# Altium PCB PCB_LM2576.PcbDoc
Units mil, origin at the board's own origin, x right, y up, seen from the top; angles counter-clockwise.
Board outline 6000 x 4000 mil, 2 copper layers (Top Layer, Bottom Layer); 7 components, 4 nets, 18 pads, 0 vias.
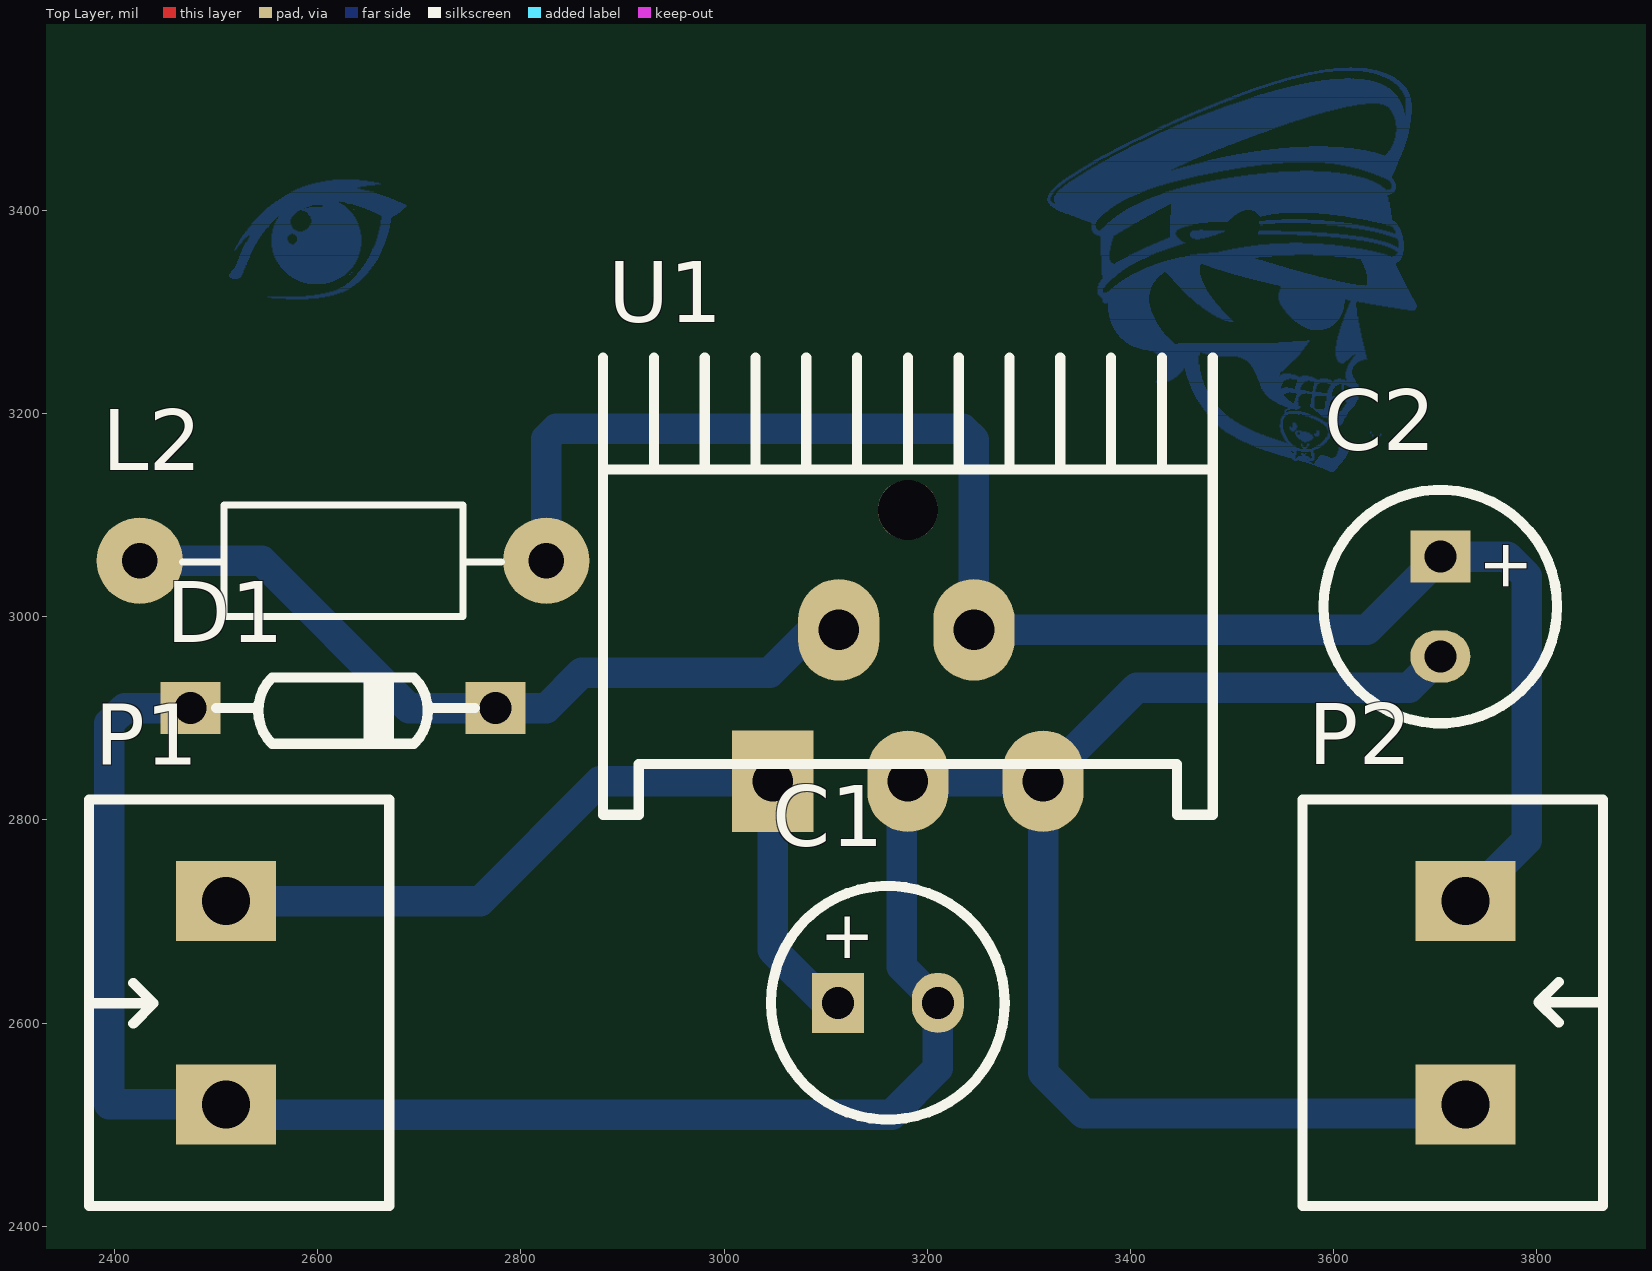
[diagram p0: Top Layer view]
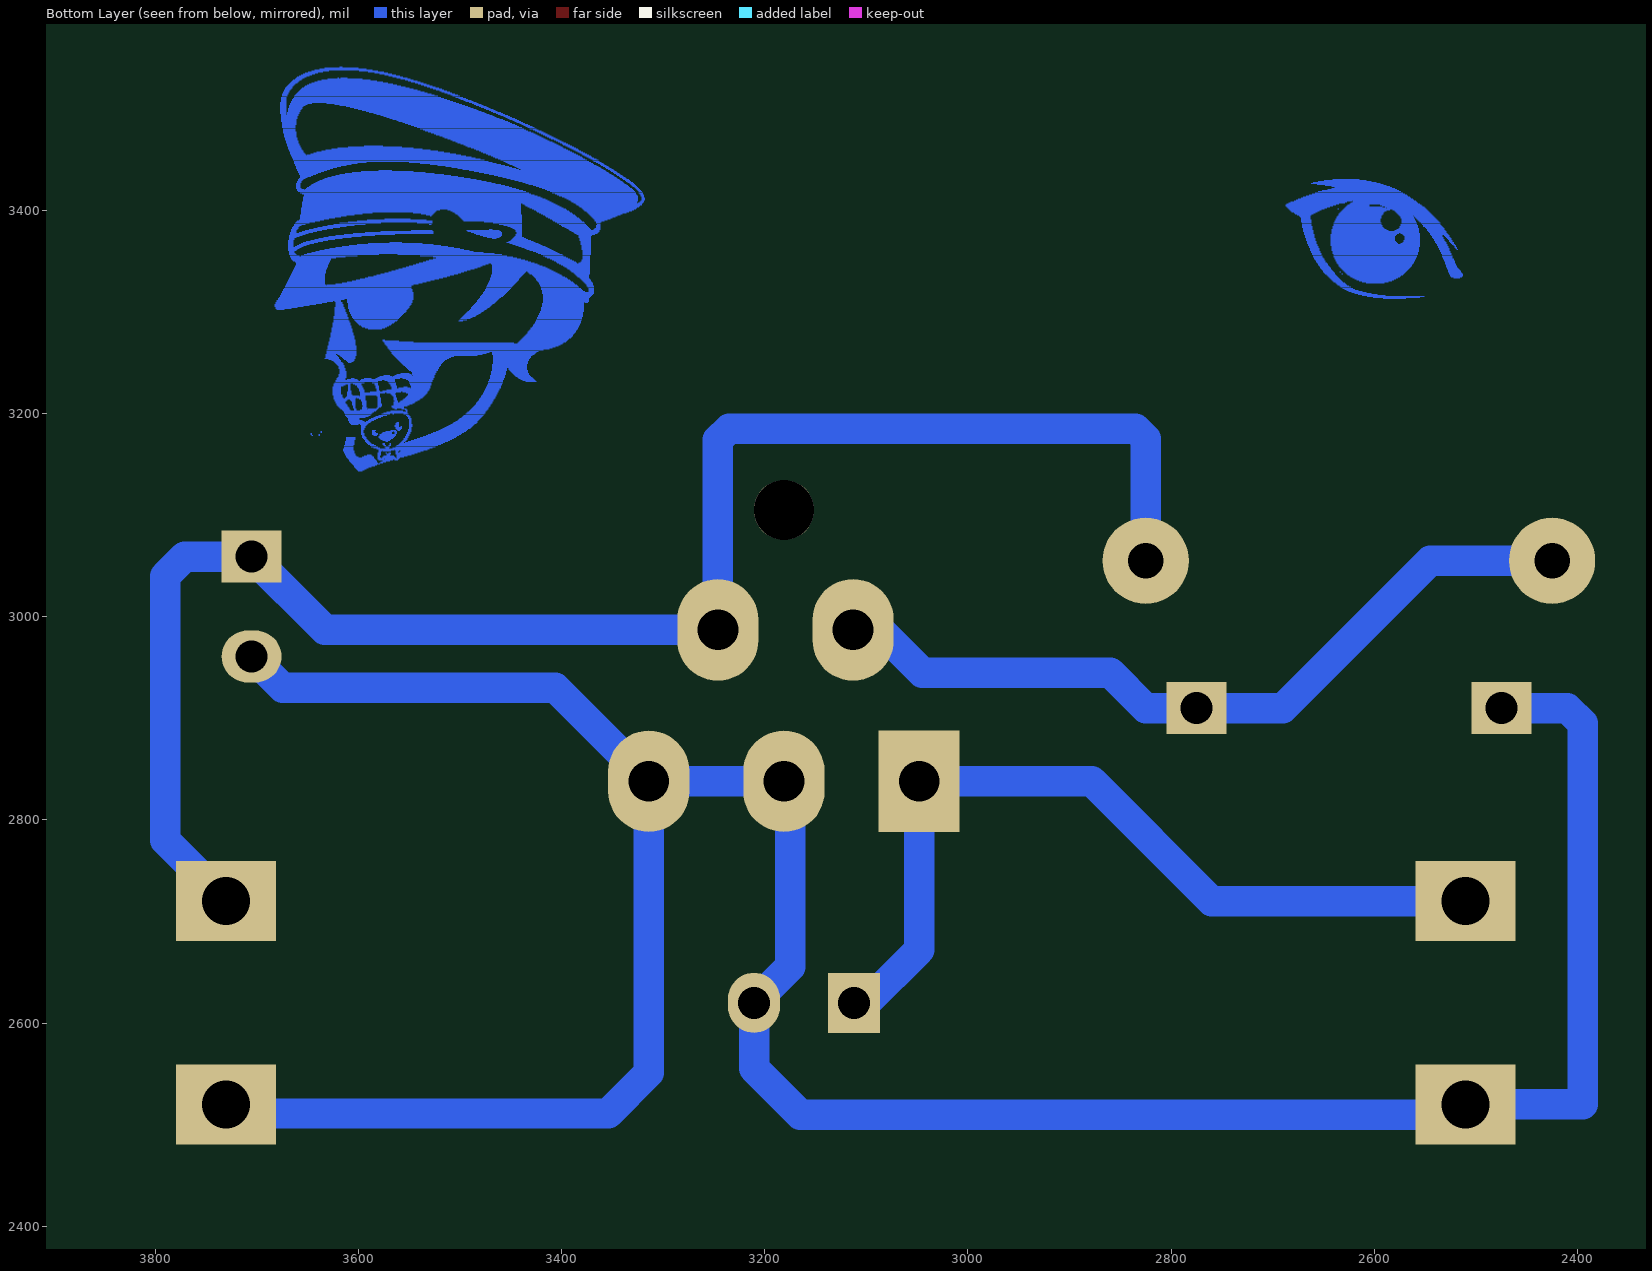
[diagram p1: Bottom Layer view, seen from below]
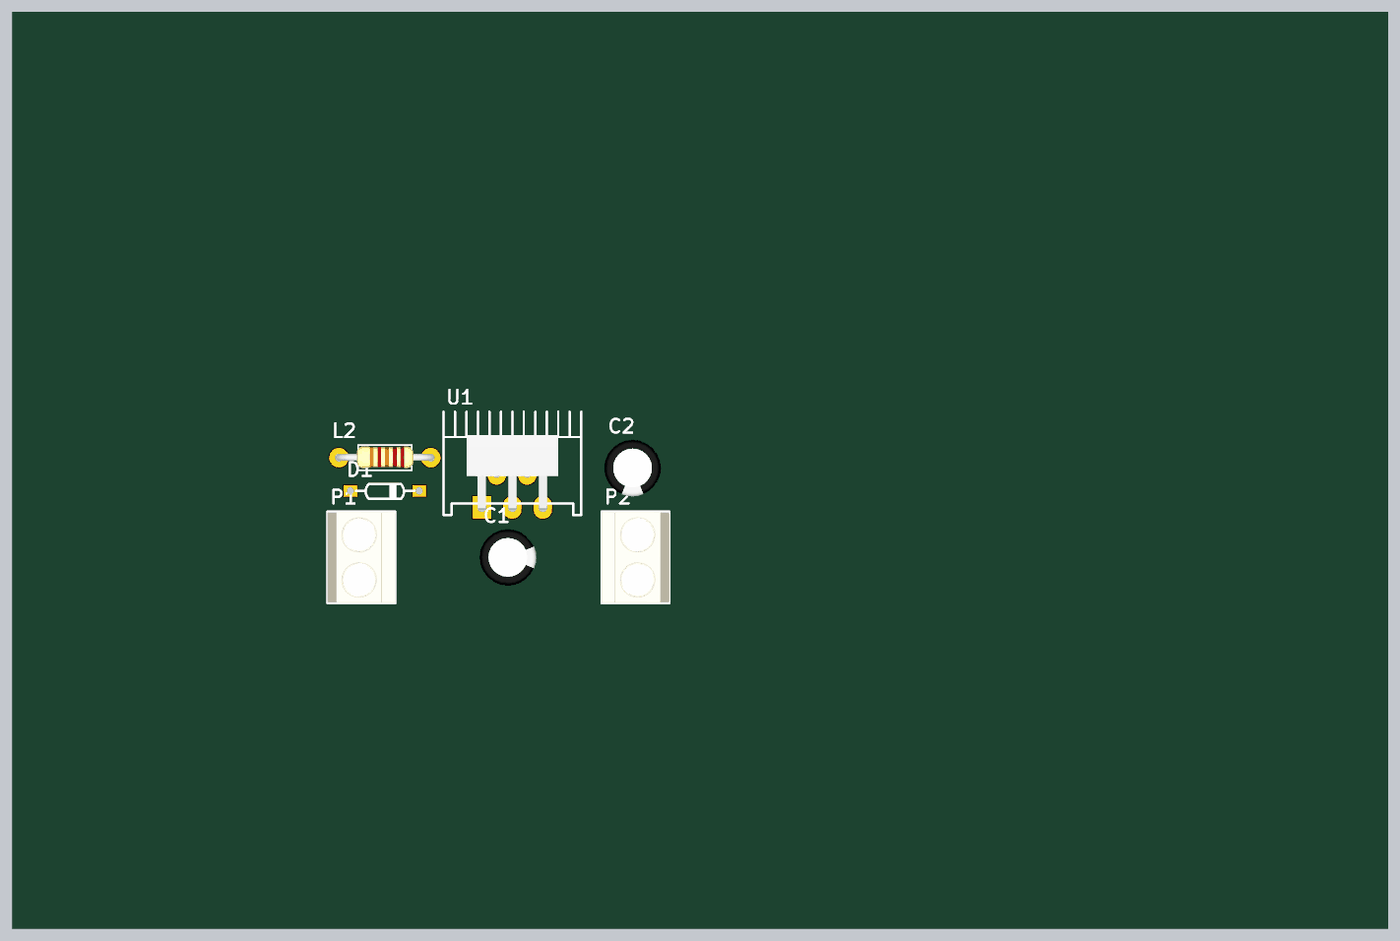
[diagram p2: 3D render of the assembled board from above, using the file's embedded part models]

## Layer stack, top to bottom
Top Solder: solder mask 0.4, Solder Resist, Dk 3.5
Top Layer: signal copper 1.4
Dielectric 1: dielectric 12.6, FR-4, Dk 4.8
Bottom Layer: signal copper 1.4
Bottom Solder: solder mask 0.4, Solder Resist, Dk 3.5

## Board outline
1000,1000 7000,1000 7000,5000 1000,5000

## Design rules (kind name [scope] priority, off if disabled: settings)
Clearance [All] p1: gap=20
PolygonConnect [All] p1: connectstyle=Relief reliefconductorwidth=10 reliefentries=4 polygonreliefangle="90 Angle" airgapwidth=10
RoutingVias [All] p1: holewidth=28 width=50 viastyle="Through Hole" minholewidth=28 minwidth=50 maxholewidth=28 maxwidth=50
SolderMaskExpansion [All] p1: expansion=4
Width [All] p1: maxlimit=100 minlimit=10 preferedwidth=20
30 further rules are at their usual default settings.

## Components (designator, comment, footprint, x,y, rotation, side; value= is the part's Value field where it differs from the comment)
C1 "Cap Pol 8mm" C8mm 3161.26,2619.99 r0 top
C2 "Cap Pol 8mm" C8mm 3705,3010 r270 top
D1 "FR307 (/FS34)" DIODE/NOM/0.5A 2475,2910 r0 top
L2 "Inductor Iron" R1/2W 2425,3055 r0 top
P1 "Header 2 - M" "Medium - Header 2" 2510,2620 r90 top
P2 "Header 2 - M" "Medium - Header 2" 3730,2620 r270 top
U1 "LM2576T-5.0" LM2576t 3180,3005 r0 top

## Footprints (in the part's own frame and the unit in brackets; to place one, negate y for a bottom-side part, rotate by r counter-clockwise, add the part's x,y. Pads: shape width x height; smd on the part's side, far side on the other; paste and mask are expansions set on the pad)
C8mm [mm]
  rect 1.3x1.5 hole 0.8: 1(-1.25,0)
  oval 1.3x1.5 hole 0.8: 2(1.25,0)
  silkscreen extent -2.92,-2.92 2.92,2.92, body extent -3.15,-3.15 3.13,3.15, height 11.51
DIODE/NOM/0.5A [mm]
  rect 1.5x1.3 hole 0.8: 1(0,0) 2(7.62,0)
  silkscreen extent 0.64,-0.89 7.11,0.76
LM2576t [mil]
  rect 80x100 hole 40: 1(-132,-167.09)
  oval 80x100 hole 40: 2(-67,-18) 3(1,-167) 4(66,-18) 5(134,-167)
  round 59.06 hole 59.06: ""(1,100)
  silkscreen extent -299,-200 301,250, body extent -199,-175 201,150, height 859
"Medium - Header 2" [mm]
  rect 2x2.5 hole 1.2: 1(-2.54,0) 2(2.54,0)
  silkscreen extent -5.08,-4.08 5.08,3.43, body extent -5,-4.07 5,3.43, height 10
R1/2W [mil] "R 1/2W, 2 pin, 300mil"
  round 85 hole 35: 1(0,0) 2(400,0)
  silkscreen extent 42,-55 356,55, body extent -12,-45 414,49, height 91

## Part data
C1 C2: "Polarized Capacitor (Axial)"
D1: library part "Diode Zener", "Zener Diode"
L2: library part "Inductor Iron_1", "Magnetic-Core Inductor"
P1 P2: "Header, 2-Pin, Medium"
U1: "SIMPLE SWITCHER; 3A Step-Down Voltage Regulator"

## Nets (pads, with @x,y where several pads share a name; then routed paths per layer and width w, separated by ;. In a path a pad name is that pad's centre, name@x,y a point inside that pad or via, vN(x,y) a via of type N, cw(c..) or ccw(c..) an arc to the next point about the centre after c; other vN are vias at no path point)
GND: C1.2 C2.2 D1.1 P1.1 P2.2 U1.3 U1.5 | length 2852.8
  Bottom Layer w30: D1.1 2410,2910 2395,2895 2395,2520 P1.1 2520,2510 3165,2510 3210.47,2555.47 C1.2 3175,2655.47 U1.3@3175,2808.53 ; U1.3 U1.5 ; C2.2 3674.21,2930 3406,2930 U1.5 ; P2.2@3721,2511 3354,2511 3314,2551 U1.5
NetD1_2: D1.2 L2.1 U1.2 | length 754
  Bottom Layer w30: L2.1 2545,3055 2690,2910 D1.2 2825,2910 2860,2945 3045,2945 U1.2@3087,2987
VIN: C1.1 P1.2 U1.1 | length 838.3
  Bottom Layer w30: P1.2 2760,2720 2877.91,2837.91 U1.1 3048,2672 3100.01,2619.99 C1.1
VOUT: C2.1 L2.2 P2.1 U1.4 | length 1663.4
  Bottom Layer w30: L2.2 2825,3175 2835,3185 3235,3185 3246,3174 U1.4 3632.79,2987 C2.1 3770.79,3059.21 3790,3040 3790,2780 P2.1
pads on no net: U1.
copper on no net: | length 62808
  Bottom Layer w1: 2513,3335 2525,3335 ; 2513,3336 2525,3336 ; 2513,3337 2526,3337 ; 2514,3334 2524,3334 ; 2514,3338 2526,3338 ; 2515,3339 2527,3339 ; 2515,3340 2527,3340 ; 2516,3333 2522,3333 ; 2516,3341 2527,3341 ; 2517,3342 2528,3342 ; 2518,3343 2528,3343 ; 2518,3361 2519,3361 ; 2519,3344 2529,3344 ; 2519,3345 2529,3345 ; 2519,3362 2520,3362 ; 2519,3363 2521,3363 ; 2520,3346 2529,3346 ; 2520,3347 2530,3347 ; 2520,3364 2521,3364 ; 2520,3365 2522,3365 ; 2521,3348 2530,3348 ; 2521,3349 2530,3349 ; 2521,3350 2531,3350 ; 2521,3366 2523,3366 ; 2522,3351 2531,3351 ; 2522,3352 2532,3352 ; 2522,3367 2524,3367 ; 2522,3368 2525,3368 ; 2523,3353 2532,3353 ; 2523,3354 2533,3354 ; 2523,3355 2533,3355 ; 2523,3369 2526,3369 ; 2523,3370 2526,3370 ; 2524,3356 2533,3356 ; 2524,3357 2534,3357 ; 2524,3371 2527,3371 ; 2524,3372 2528,3372 ; 2525,3358 2534,3358 ; 2525,3359 2535,3359 ; 2525,3373 2529,3373 ; 2526,3360 2535,3360 ; 2526,3361 2536,3361 ; 2526,3362 2536,3362 ; 2526,3374 2530,3374 ; 2526,3375 2531,3375 ; 2527,3363 2537,3363 ; 2527,3364 2537,3364 ; 2527,3376 2545,3376 ; 2528,3365 2538,3365 ; 2528,3366 2538,3366 ; 2528,3377 2545,3377 ; 2529,3367 2539,3367 ; 2529,3368 2540,3368 ; 2529,3378 2546,3378 ; 2529,3379 2547,3379 ; 2530,3369 2540,3369 ; 2530,3380 2548,3380 ; 2531,3370 2541,3370 ; 2531,3371 2541,3371 ; 2531,3381 2548,3381 ; 2531,3382 2549,3382 ; 2532,3372 2542,3372 ; 2532,3373 2543,3373 ; 2532,3383 2550,3383 ; 2533,3374 2543,3374 ; 2533,3375 2544,3375 ; 2533,3384 2552,3384 ; 2534,3385 2552,3385 ; 2535,3386 2553,3386 ; 2535,3387 2554,3387 ; 2536,3388 2555,3388 ; 2537,3389 2556,3389 ; 2538,3390 2557,3390 ; 2539,3391 2558,3391 ; 2540,3392 2559,3392 ; 2541,3393 2560,3393 ; 2542,3394 2561,3394 ; 2543,3395 2576,3395 ; 2544,3396 2577,3396 ; 2545,3397 2578,3397 ; 2546,3398 2579,3398 ; 2547,3399 2580,3399 ; 2548,3400 2582,3400 ; 2549,3401 2630,3401 ; 2550,3402 2587,3402 ; 2551,3315 2607,3315 ; 2551,3403 2589,3403 ; 2553,3404 2592,3404 ; 2554,3405 2594,3405 ; 2555,3314 2601,3314 ; 2555,3364 2642,3364 ; 2555,3365 2643,3365 ; 2555,3366 2643,3366 ; 2555,3367 2574,3367 ; 2555,3368 2572,3368 ; 2555,3369 2571,3369 ; 2555,3370 2571,3370 ; 2555,3371 2570,3371 ; 2555,3372 2570,3372 ; 2555,3373 2570,3373 ; 2555,3374 2570,3374 ; 2555,3375 2571,3375 ; 2555,3376 2572,3376 ; 2555,3377 2574,3377 ; 2555,3406 2624,3406 ; 2556,3359 2641,3359 ; 2556,3360 2642,3360 ; 2556,3361 2642,3361 ; 2556,3362 2642,3362 ; 2556,3363 2642,3363 ; 2556,3378 2642,3378 ; 2556,3379 2642,3379 ; 2556,3380 2580,3380 ; 2556,3381 2578,3381 ; 2556,3382 2576,3382 ; 2557,3356 2640,3356 ; 2557,3357 2641,3357 ; 2557,3358 2641,3358 ; 2557,3383 2575,3383 ; 2557,3384 2575,3384 ; 2557,3385 2574,3385 ; 2557,3407 2623,3407 ; 2558,3354 2640,3354 ; 2558,3355 2640,3355 ; 2558,3386 2574,3386 ; 2558,3387 2573,3387 ; 2558,3408 2621,3408 ; 2559,3352 2639,3352 ; 2559,3353 2639,3353 ; 2559,3388 2573,3388 ; 2559,3389 2573,3389 ; 2559,3409 2621,3409 ; 2560,3350 2638,3350 ; 2560,3351 2638,3351 ; 2560,3390 2573,3390 ; 2560,3391 2573,3391 ; 2561,3348 2637,3348 ; 2561,3349 2637,3349 ; 2561,3392 2574,3392 ; 2561,3393 2574,3393 ; 2561,3410 2677,3410 ; 2562,3347 2636,3347 ; 2562,3394 2575,3394 ; 2562,3411 2675,3411 ; 2563,3345 2635,3345 ; 2563,3346 2635,3346 ; 2564,3344 2634,3344 ; 2564,3412 2672,3412 ; 2565,3343 2633,3343 ; 2565,3413 2670,3413 ; 2566,3342 2632,3342 ; 2567,3341 2631,3341 ; 2567,3414 2667,3414 ; 2568,3340 2630,3340 ; 2568,3415 2664,3415 ; 2569,3313 2591,3313 ; 2569,3339 2629,3339 ; 2570,3338 2628,3338 ; 2570,3416 2661,3416 ; 2571,3337 2627,3337 ; 2572,3336 2626,3336 ; 2572,3417 2658,3417 ; 2574,3335 2624,3335 ; 2574,3418 2655,3418 ; 2575,3334 2623,3334 ; 2576,3377 2642,3377 ; 2576,3419 2651,3419 ; 2577,3333 2621,3333 ; 2577,3367 2643,3367 ; 2578,3368 2643,3368 ; 2578,3376 2643,3376 ; 2578,3420 2646,3420 ; 2579,3332 2619,3332 ; 2579,3369 2643,3369 ; 2579,3375 2643,3375 ; 2580,3370 2643,3370 ; 2580,3371 2643,3371 ; 2580,3372 2643,3372 ; 2580,3373 2643,3373 ; 2580,3374 2643,3374 ; 2580,3421 2642,3421 ; 2581,3331 2617,3331 ; 2583,3330 2615,3330 ; 2583,3422 2639,3422 ; 2585,3400 2631,3400 ; 2585,3423 2642,3423 ; 2586,3329 2612,3329 ; 2586,3380 2642,3380 ; 2588,3381 2642,3381 ; 2588,3399 2632,3399 ; 2588,3402 2629,3402 ; 2588,3424 2648,3424 ; 2589,3316 2612,3316 ; 2590,3328 2608,3328 ; 2590,3382 2641,3382 ; 2590,3398 2633,3398 ; 2591,3383 2641,3383 ; 2591,3396 2635,3396 ; 2591,3397 2634,3397 ; 2591,3425 2656,3425 ; 2592,3384 2641,3384 ; 2592,3385 2640,3385 ; 2592,3395 2635,3395 ; 2592,3403 2628,3403 ; 2593,3386 2640,3386 ; 2593,3387 2640,3387 ; 2593,3392 2637,3392 ; 2593,3393 2637,3393 ; 2593,3394 2636,3394 ; 2594,3388 2639,3388 ; 2594,3389 2639,3389 ; 2594,3390 2638,3390 ; 2594,3391 2638,3391 ; 2594,3426 2662,3426 ; 2597,3317 2616,3317 ; 2598,3427 2660,3427 ; 2603,3318 2619,3318 ; 2603,3428 2655,3428 ; 2605,3404 2627,3404 ; 2605,3405 2626,3405 ; 2608,3319 2622,3319 ; 2608,3429 2649,3429 ; 2612,3320 2625,3320 ; 2615,3430 2641,3430 ; 2616,3321 2627,3321 ; 2619,3322 2629,3322 ; 2621,3323 2631,3323 ; 2622,3409 2679,3409 ; 2623,3324 2633,3324 ; 2625,3325 2634,3325 ; 2627,3326 2636,3326 ; 2627,3408 2682,3408 ; 2628,3327 2637,3327 ; 2629,3328 2638,3328 ; 2629,3407 2684,3407 ; 2631,3329 2640,3329 ; 2631,3337 2632,3337 ; 2632,3330 2641,3330 ; 2633,3331 2642,3331 ; 2633,3339 2634,3339 ; 2634,3332 2643,3332 ; 2635,3333 2644,3333 ; 2635,3401 2636,3401 ; 2635,3406 2686,3406 ; 2636,3334 2645,3334 ; 2637,3335 2646,3335 ; 2638,3336 2647,3336 ; 2638,3405 2687,3405 ; 2639,3337 2648,3337 ; 2639,3338 2649,3338 ; 2640,3339 2650,3339 ; 2641,3340 2650,3340 ; 2641,3404 2687,3404 ; 2642,3341 2651,3341 ; 2643,3342 2652,3342 ; 2643,3343 2653,3343 ; 2644,3344 2653,3344 ; 2644,3403 2686,3403 ; 2645,3345 2654,3345 ; 2646,3346 2655,3346 ; 2646,3347 2655,3347 ; 2647,3348 2656,3348 ; 2647,3402 2685,3402 ; 2648,3349 2657,3349 ; 2648,3350 2657,3350 ; 2649,3351 2658,3351 ; 2649,3352 2659,3352 ; 2649,3401 2684,3401 ; 2650,3353 2659,3353 ; 2651,3354 2660,3354 ; 2651,3355 2660,3355 ; 2652,3356 2661,3356 ; 2652,3357 2661,3357 ; 2652,3400 2683,3400 ; 2653,3358 2662,3358 ; 2653,3359 2662,3359 ; 2654,3360 2663,3360 ; 2654,3361 2663,3361 ; 2654,3362 2663,3362 ; 2654,3399 2682,3399 ; 2655,3363 2664,3363 ; 2655,3364 2664,3364 ; 2656,3365 2665,3365 ; 2656,3366 2665,3366 ; 2656,3398 2681,3398 ; 2657,3367 2666,3367 ; 2657,3368 2666,3368 ; 2657,3369 2666,3369 ; 2658,3370 2667,3370 ; 2658,3371 2667,3371 ; 2658,3372 2667,3372 ; 2658,3397 2679,3397 ; 2659,3373 2668,3373 ; 2659,3374 2668,3374 ; 2659,3375 2668,3375 ; 2659,3376 2669,3376 ; 2660,3377 2669,3377 ; 2660,3378 2669,3378 ; 2660,3379 2670,3379 ; 2660,3380 2670,3380 ; 2660,3396 2678,3396 ; 2661,3381 2670,3381 ; 2661,3382 2670,3382 ; 2661,3383 2671,3383 ; 2661,3384 2671,3384 ; 2662,3385 2671,3385 ; 2662,3386 2671,3386 ; 2662,3387 2671,3387 ; 2662,3388 2672,3388 ; 2662,3389 2672,3389 ; 2662,3390 2672,3390 ; 2662,3395 2676,3395 ; 2663,3391 2672,3391 ; 2663,3392 2672,3392 ; 2663,3393 2673,3393 ; 2663,3394 2674,3394 ; 3318,3410 3321,3410 ; 3318,3411 3321,3411 ; 3318,3412 3321,3412 ; 3319,3408 3323,3408 ; 3319,3409 3322,3409 ; 3319,3413 3321,3413 ; 3319,3414 3322,3414 ; 3319,3415 3322,3415 ; 3320,3407 3325,3407 ; 3320,3416 3323,3416 ; 3320,3417 3324,3417 ; 3321,3405 3385,3405 ; 3321,3406 3386,3406 ; 3321,3418 3324,3418 ; 3322,3419 3325,3419 ; 3323,3404 3383,3404 ; 3323,3420 3326,3420 ; 3324,3403 3382,3403 ; 3324,3421 3327,3421 ; 3325,3409 3391,3409 ; 3325,3410 3393,3410 ; 3325,3411 3395,3411 ; 3325,3412 3397,3412 ; 3325,3413 3399,3413 ; 3325,3414 3402,3414 ; 3325,3422 3328,3422 ; 3326,3402 3380,3402 ; 3326,3407 3388,3407 ; 3326,3408 3390,3408 ; 3326,3415 3404,3415 ; 3326,3423 3330,3423 ; 3327,3401 3379,3401 ; 3327,3416 3406,3416 ; 3327,3417 3409,3417 ; 3327,3424 3331,3424 ; 3328,3418 3411,3418 ; 3328,3425 3332,3425 ; 3329,3400 3378,3400 ; 3329,3419 3414,3419 ; 3329,3426 3333,3426 ; 3330,3420 3416,3420 ; 3330,3427 3335,3427 ; 3331,3399 3377,3399 ; 3331,3421 3419,3421 ; 3332,3428 3336,3428 ; 3333,3422 3422,3422 ; 3333,3429 3337,3429 ; 3334,3398 3375,3398 ; 3334,3423 3425,3423 ; 3334,3430 3339,3430 ; 3335,3424 3428,3424 ; 3336,3397 3374,3397 ; 3336,3425 3432,3425 ; 3336,3431 3340,3431 ; 3337,3432 3342,3432 ; 3338,3426 3435,3426 ; 3339,3427 3438,3427 ; 3339,3433 3343,3433 ; 3340,3396 3373,3396 ; 3340,3428 3442,3428 ; 3340,3434 3345,3434 ; 3342,3395 3372,3395 ; 3342,3429 3446,3429 ; 3342,3435 3346,3435 ; 3343,3430 3450,3430 ; 3343,3436 3348,3436 ; 3345,3394 3371,3394 ; 3345,3431 3454,3431 ; 3345,3437 3349,3437 ; 3346,3432 3458,3432 ; 3346,3438 3351,3438 ; 3347,3393 3370,3393 ; 3348,3433 3462,3433 ; 3348,3439 3352,3439 ; 3349,3434 3466,3434 ; 3349,3440 3354,3440 ; 3350,3392 3369,3392 ; 3351,3435 3471,3435 ; 3351,3441 3356,3441 ; 3352,3391 3368,3391 ; 3353,3436 3476,3436 ; 3353,3442 3357,3442 ; 3354,3437 3481,3437 ; 3354,3443 3359,3443 ; 3355,3390 3367,3390 ; 3356,3438 3486,3438 ; 3356,3444 3361,3444 ; 3357,3439 3491,3439 ; 3358,3389 3367,3389 ; 3358,3445 3362,3445 ; 3359,3440 3440,3440 ; 3359,3446 3364,3446 ; 3361,3388 3366,3388 ; 3361,3441 3442,3441 ; 3361,3447 3366,3447 ; 3362,3381 3368,3381 ; 3362,3382 3367,3382 ; 3362,3383 3366,3383 ; 3362,3384 3366,3384 ; 3362,3385 3366,3385 ; 3362,3386 3365,3386 ; 3362,3387 3366,3387 ; 3362,3442 3444,3442 ; 3363,3379 3390,3379 ; 3363,3380 3392,3380 ; 3363,3448 3368,3448 ; 3364,3378 3388,3378 ; 3364,3443 3446,3443 ; 3364,3449 3369,3449 ; 3365,3377 3387,3377 ; 3366,3444 3448,3444 ; 3366,3450 3371,3450 ; 3367,3376 3385,3376 ; 3368,3318 3419,3318 ; 3368,3319 3419,3319 ; 3368,3320 3373,3320 ; 3368,3321 3373,3321 ; 3368,3322 3373,3322 ; 3368,3323 3373,3323 ; 3368,3324 3374,3324 ; 3368,3325 3375,3325 ; 3368,3445 3451,3445 ; 3368,3451 3373,3451 ; 3369,3317 3418,3317 ; 3369,3326 3375,3326 ; 3369,3327 3376,3327 ; 3369,3328 3377,3328 ; 3369,3446 3453,3446 ; 3370,3316 3418,3316 ; 3370,3329 3378,3329 ; 3370,3375 3383,3375 ; 3370,3452 3375,3452 ; 3371,3315 3418,3315 ; 3371,3330 3379,3330 ; 3371,3331 3380,3331 ; 3371,3356 3379,3356 ; 3371,3357 3379,3357 ; 3371,3358 3379,3358 ; 3371,3359 3379,3359 ; 3371,3360 3379,3360 ; 3371,3361 3380,3361 ; 3371,3362 3380,3362 ; 3371,3363 3380,3363 ; 3371,3364 3380,3364 ; 3371,3365 3380,3365 ; 3371,3366 3381,3366 ; 3371,3367 3381,3367 ; 3371,3368 3381,3368 ; 3371,3369 3381,3369 ; 3371,3370 3382,3370 ; 3371,3371 3382,3371 ; 3371,3372 3382,3372 ; 3371,3373 3383,3373 ; 3371,3374 3383,3374 ; 3371,3381 3393,3381 ; 3371,3447 3455,3447 ; 3371,3453 3377,3453 ; 3372,3314 3418,3314 ; 3372,3332 3381,3332 ; 3372,3337 3387,3337 ; 3372,3338 3388,3338 ; 3372,3339 3390,3339 ; 3372,3340 3391,3340 ; 3372,3341 3392,3341 ; 3372,3342 3394,3342 ; 3372,3343 3395,3343 ; 3372,3344 3397,3344 ; 3372,3345 3398,3345 ; 3372,3346 3400,3346 ; 3372,3347 3402,3347 ; 3372,3348 3383,3348 ; 3372,3349 3381,3349 ; 3372,3350 3380,3350 ; 3372,3351 3380,3351 ; 3372,3352 3379,3352 ; 3372,3353 3379,3353 ; 3372,3354 3379,3354 ; 3372,3355 3379,3355 ; 3372,3382 3395,3382 ; 3373,3310 3418,3310 ; 3373,3311 3418,3311 ; 3373,3312 3418,3312 ; 3373,3313 3418,3313 ; 3373,3333 3382,3333 ; 3373,3334 3384,3334 ; 3373,3335 3385,3335 ; 3373,3336 3386,3336 ; 3373,3383 3397,3383 ; 3373,3448 3457,3448 ; 3373,3454 3379,3454 ; 3374,3309 3377,3309 ; 3374,3384 3399,3384 ; 3375,3385 3400,3385 ; 3375,3449 3460,3449 ; 3375,3455 3380,3455 ; 3376,3386 3402,3386 ; 3377,3320 3419,3320 ; 3377,3387 3404,3387 ; 3377,3450 3462,3450 ; 3377,3456 3382,3456 ; 3378,3300 3421,3300 ; 3378,3301 3420,3301 ; 3378,3302 3420,3302 ; 3378,3303 3420,3303 ; 3378,3304 3420,3304 ; 3378,3305 3419,3305 ; 3378,3306 3419,3306 ; 3378,3307 3419,3307 ; 3378,3308 3419,3308 ; 3378,3309 3418,3309 ; 3378,3388 3406,3388 ; 3379,3295 3423,3295 ; 3379,3296 3423,3296 ; 3379,3297 3422,3297 ; 3379,3298 3422,3298 ; 3379,3299 3421,3299 ; 3379,3321 3419,3321 ; 3379,3451 3465,3451 ; 3379,3457 3384,3457 ; 3380,3292 3425,3292 ; 3380,3293 3424,3293 ; 3380,3294 3424,3294 ; 3380,3322 3420,3322 ; 3380,3389 3408,3389 ; 3380,3452 3467,3452 ; 3381,3289 3426,3289 ; 3381,3290 3426,3290 ; 3381,3291 3425,3291 ; 3381,3323 3420,3323 ; 3381,3390 3409,3390 ; 3381,3458 3386,3458 ; 3382,3287 3428,3287 ; 3382,3288 3427,3288 ; 3382,3391 3411,3391 ; 3382,3453 3469,3453 ; 3383,3285 3429,3285 ; 3383,3286 3428,3286 ; 3383,3324 3420,3324 ; 3383,3392 3413,3392 ; 3383,3459 3388,3459 ; 3384,3283 3430,3283 ; 3384,3284 3430,3284 ; 3384,3325 3421,3325 ; 3384,3454 3472,3454 ; 3384,3460 3390,3460 ; 3385,3282 3431,3282 ; 3385,3326 3421,3326 ; 3385,3348 3404,3348 ; 3385,3393 3415,3393 ; 3386,3280 3433,3280 ; 3386,3281 3432,3281 ; 3386,3349 3405,3349 ; 3386,3394 3416,3394 ; 3386,3455 3474,3455 ; 3386,3461 3392,3461 ; 3387,3279 3433,3279 ; 3387,3327 3422,3327 ; 3387,3395 3418,3395 ; 3388,3278 3434,3278 ; 3388,3328 3422,3328 ; 3388,3350 3407,3350 ; 3388,3456 3477,3456 ; 3388,3462 3394,3462 ; 3389,3276 3436,3276 ; 3389,3277 3435,3277 ; 3389,3329 3423,3329 ; 3389,3396 3420,3396 ; 3390,3275 3437,3275 ; 3390,3351 3409,3351 ; 3390,3397 3422,3397 ; 3390,3457 3479,3457 ; 3390,3463 3396,3463 ; 3391,3274 3438,3274 ; 3391,3330 3424,3330 ; 3392,3331 3425,3331 ; 3392,3352 3411,3352 ; 3392,3398 3424,3398 ; 3392,3458 3481,3458 ; 3392,3464 3398,3464 ; 3393,3273 3439,3273 ; 3393,3399 3425,3399 ; 3394,3272 3440,3272 ; 3394,3332 3425,3332 ; 3394,3353 3414,3353 ; 3394,3459 3484,3459 ; 3394,3465 3399,3465 ; 3395,3271 3441,3271 ; 3395,3333 3426,3333 ; 3395,3400 3427,3400 ; 3396,3270 3442,3270 ; 3396,3354 3416,3354 ; 3396,3401 3429,3401 ; 3396,3460 3486,3460 ; 3396,3466 3401,3466 ; 3397,3334 3427,3334 ; 3398,3269 3443,3269 ; 3398,3355 3418,3355 ; 3398,3402 3431,3402 ; 3398,3461 3489,3461 ; 3398,3467 3403,3467 ; 3399,3268 3574,3268 ; 3399,3335 3428,3335 ; 3399,3356 3420,3356 ; 3399,3462 3492,3462 ; 3400,3336 3429,3336 ; 3400,3403 3433,3403 ; 3400,3468 3405,3468 ; 3401,3267 3573,3267 ; 3401,3463 3494,3463 ; 3402,3337 3431,3337 ; 3402,3357 3423,3357 ; 3402,3404 3435,3404 ; 3402,3469 3407,3469 ; 3403,3266 3572,3266 ; 3403,3464 3496,3464 ; 3404,3338 3432,3338 ; 3404,3358 3425,3358 ; 3404,3405 3436,3405 ; 3404,3470 3410,3470 ; 3405,3465 3499,3465 ; 3406,3265 3571,3265 ; 3406,3339 3433,3339 ; 3406,3359 3428,3359 ; 3406,3406 3438,3406 ; 3406,3471 3412,3471 ; 3407,3466 3502,3466 ; 3408,3340 3468,3340 ; 3408,3360 3431,3360 ; 3408,3407 3655,3407 ; 3408,3472 3414,3472 ; 3409,3264 3571,3264 ; 3409,3467 3504,3467 ; 3410,3341 3468,3341 ; 3410,3361 3434,3361 ; 3410,3408 3655,3408 ; 3410,3473 3416,3473 ; 3412,3263 3570,3263 ; 3412,3342 3468,3342 ; 3412,3362 3436,3362 ; 3412,3409 3654,3409 ; 3412,3468 3507,3468 ; 3412,3474 3418,3474 ; 3414,3343 3468,3343 ; 3414,3363 3439,3363 ; 3414,3410 3654,3410 ; 3414,3469 3509,3469 ; 3414,3475 3420,3475 ; 3416,3344 3468,3344 ; 3416,3364 3442,3364 ; 3416,3411 3654,3411 ; 3416,3470 3512,3470 ; 3416,3476 3422,3476 ; 3418,3262 3569,3262 ; 3418,3471 3515,3471 ; 3418,3477 3424,3477 ; 3419,3345 3468,3345 ; 3419,3365 3445,3365 ; 3419,3412 3654,3412 ; 3420,3472 3517,3472 ; 3420,3478 3426,3478 ; 3421,3366 3448,3366 ; 3421,3413 3654,3413 ; 3422,3346 3468,3346 ; 3422,3473 3520,3473 ; 3423,3261 3568,3261 ; 3423,3367 3451,3367 ; 3423,3479 3428,3479 ; 3424,3347 3469,3347 ; 3424,3414 3653,3414 ; 3424,3474 3523,3474 ; 3425,3231 3435,3231 ; 3425,3260 3468,3260 ; 3425,3480 3431,3480 ; 3426,3232 3438,3232 ; 3426,3259 3468,3259 ; 3426,3368 3454,3368 ; 3426,3475 3525,3475 ; 3427,3233 3440,3233 ; 3427,3258 3468,3258 ; 3427,3348 3540,3348 ; 3427,3415 3653,3415 ; 3427,3481 3433,3481 ; 3428,3234 3442,3234 ; 3428,3369 3452,3369 ; 3428,3476 3528,3476 ; 3429,3235 3443,3235 ; 3429,3257 3467,3257 ; 3429,3482 3435,3482 ; 3430,3236 3445,3236 ; 3430,3255 3467,3255 ; 3430,3256 3467,3256 ; 3430,3349 3536,3349 ; 3430,3370 3450,3370 ; 3430,3416 3655,3416 ; 3430,3477 3531,3477 ; 3431,3237 3446,3237 ; 3431,3254 3467,3254 ; 3431,3483 3437,3483 ; 3432,3238 3447,3238 ; 3432,3239 3448,3239 ; 3432,3252 3467,3252 ; 3432,3253 3467,3253 ; 3432,3417 3657,3417 ; 3433,3240 3449,3240 ; 3433,3241 3450,3241 ; 3433,3242 3451,3242 ; 3433,3249 3467,3249 ; 3433,3250 3467,3250 ; 3433,3251 3467,3251 ; 3433,3350 3533,3350 ; 3433,3371 3449,3371 ; 3433,3478 3534,3478 ; 3433,3484 3439,3484 ; 3434,3243 3452,3243 ; 3434,3244 3452,3244 ; 3434,3245 3468,3245 ; 3434,3246 3468,3246 ; 3434,3247 3468,3247 ; 3434,3248 3468,3248 ; 3435,3339 3468,3339 ; 3435,3372 3448,3372 ; 3435,3418 3659,3418 ; 3435,3479 3536,3479 ; 3436,3338 3468,3338 ; 3436,3351 3530,3351 ; 3436,3485 3441,3485 ; 3437,3337 3468,3337 ; 3437,3373 3447,3373 ; 3437,3480 3539,3480 ; 3438,3336 3469,3336 ; 3438,3419 3660,3419 ; 3438,3486 3444,3486 ; 3439,3335 3469,3335 ; 3439,3374 3446,3374 ; 3439,3375 3445,3375 ; 3439,3376 3445,3376 ; 3439,3377 3444,3377 ; 3439,3378 3444,3378 ; 3439,3379 3445,3379 ; 3439,3380 3445,3380 ; 3439,3381 3446,3381 ; 3439,3382 3448,3382 ; 3439,3383 3450,3383 ; 3439,3384 3453,3384 ; 3439,3385 3457,3385 ; 3439,3386 3461,3386 ; 3439,3387 3467,3387 ; 3439,3388 3476,3388 ; 3439,3389 3496,3389 ; 3439,3390 3497,3390 ; 3439,3391 3498,3391 ; 3439,3392 3499,3392 ; 3439,3393 3500,3393 ; 3439,3394 3501,3394 ; 3439,3395 3502,3395 ; 3439,3481 3542,3481 ; 3440,3334 3469,3334 ; 3440,3352 3526,3352 ; 3440,3396 3504,3396 ; 3440,3397 3505,3397 ; 3440,3398 3507,3398 ; 3440,3399 3509,3399 ; 3440,3400 3512,3400 ; 3440,3401 3656,3401 ; 3440,3402 3656,3402 ; 3440,3403 3655,3403 ; 3440,3404 3655,3404 ; 3440,3405 3655,3405 ; 3440,3406 3655,3406 ; 3440,3487 3446,3487 ; 3441,3333 3470,3333 ; 3442,3331 3470,3331 ; 3442,3332 3470,3332 ; 3442,3420 3652,3420 ; 3442,3440 3497,3440 ; 3442,3482 3545,3482 ; 3442,3488 3448,3488 ; 3443,3330 3471,3330 ; 3444,3329 3471,3329 ; 3444,3353 3523,3353 ; 3444,3483 3548,3483 ; 3444,3489 3451,3489 ; 3445,3328 3472,3328 ; 3445,3421 3651,3421 ; 3445,3441 3502,3441 ; 3446,3327 3472,3327 ; 3446,3484 3551,3484 ; 3446,3490 3453,3490 ; 3447,3269 3574,3269 ; 3447,3326 3473,3326 ; 3448,3325 3473,3325 ; 3448,3354 3526,3354 ; 3449,3324 3474,3324 ; 3449,3422 3650,3422 ; 3449,3442 3508,3442 ; 3449,3485 3554,3485 ; 3449,3491 3455,3491 ; 3450,3323 3474,3323 ; 3451,3322 3475,3322 ; 3451,3486 3556,3486 ; 3451,3492 3457,3492 ; 3452,3321 3475,3321 ; 3452,3423 3648,3423 ; 3452,3443 3514,3443 ; 3453,3320 3476,3320 ; 3453,3487 3560,3487 ; 3453,3493 3460,3493 ; 3454,3242 3468,3242 ; 3454,3243 3468,3243 ; 3454,3244 3468,3244 ; 3454,3319 3477,3319 ; 3454,3355 3539,3355 ; 3455,3238 3469,3238 ; 3455,3239 3469,3239 ; 3455,3240 3469,3240 ; 3455,3241 3469,3241 ; 3455,3318 3477,3318 ; 3456,3235 3470,3235 ; 3456,3236 3470,3236 ; 3456,3237 3470,3237 ; 3456,3317 3478,3317 ; 3456,3424 3647,3424 ; 3456,3444 3522,3444 ; 3456,3488 3562,3488 ; 3456,3494 3462,3494 ; 3457,3233 3471,3233 ; 3457,3234 3470,3234 ; 3457,3316 3479,3316 ; 3458,3230 3472,3230 ; 3458,3231 3472,3231 ; 3458,3232 3471,3232 ; 3458,3315 3480,3315 ; 3458,3489 3566,3489 ; 3458,3495 3464,3495 ; 3459,3228 3473,3228 ; 3459,3229 3472,3229 ; 3459,3356 3561,3356 ; 3459,3375 3480,3375 ; 3459,3376 3484,3376 ; 3459,3377 3486,3377 ; 3459,3378 3489,3378 ; 3460,3225 3474,3225 ; 3460,3226 3474,3226 ; 3460,3227 3473,3227 ; 3460,3314 3480,3314 ; 3460,3374 3477,3374 ; 3460,3379 3492,3379 ; 3460,3425 3646,3425 ; 3460,3445 3529,3445 ; 3460,3496 3467,3496 ; 3461,3223 3475,3223 ; 3461,3224 3475,3224 ; 3461,3313 3481,3313 ; 3461,3373 3473,3373 ; 3461,3380 3493,3380 ; 3461,3490 3569,3490 ; 3462,3221 3476,3221 ; 3462,3222 3476,3222 ; 3462,3312 3482,3312 ; 3463,3219 3477,3219 ; 3463,3220 3477,3220 ; 3463,3311 3483,3311 ; 3463,3497 3469,3497 ; 3464,3217 3479,3217 ; 3464,3218 3478,3218 ; 3464,3310 3483,3310 ; 3464,3372 3468,3372 ; 3464,3446 3539,3446 ; 3464,3491 3572,3491 ; 3465,3215 3480,3215 ; 3465,3216 3479,3216 ; 3465,3309 3484,3309 ; 3465,3426 3644,3426 ; 3465,3498 3471,3498 ; 3466,3214 3481,3214 ; 3466,3308 3485,3308 ; 3466,3357 3650,3357 ; 3466,3492 3575,3492 ; 3467,3212 3482,3212 ; 3467,3213 3481,3213 ; 3467,3499 3474,3499 ; 3468,3210 3484,3210 ; 3468,3211 3483,3211 ; 3468,3307 3486,3307 ; 3468,3381 3471,3381 ; 3468,3447 3550,3447 ; 3468,3493 3578,3493 ; 3469,3209 3484,3209 ; 3469,3306 3487,3306 ; 3469,3427 3642,3427 ; 3470,3207 3486,3207 ; 3470,3208 3485,3208 ; 3470,3305 3488,3305 ; 3470,3500 3476,3500 ; 3471,3206 3487,3206 ; 3471,3260 3567,3260 ; 3471,3304 3489,3304 ; 3471,3494 3582,3494 ; 3472,3204 3489,3204 ; 3472,3205 3488,3205 ; 3472,3347 3543,3347 ; 3472,3448 3663,3448 ; 3472,3501 3479,3501 ; 3473,3203 3490,3203 ; 3473,3303 3489,3303 ; 3474,3202 3491,3202 ; 3474,3259 3567,3259 ; 3474,3302 3490,3302 ; 3474,3428 3640,3428 ; 3474,3495 3585,3495 ; 3474,3502 3481,3502 ; 3475,3200 3493,3200 ; 3475,3201 3492,3201 ; 3475,3346 3546,3346 ; 3476,3199 3494,3199 ; 3476,3301 3491,3301 ; 3476,3449 3664,3449 ; 3476,3496 3589,3496 ; 3477,3198 3496,3198 ; 3477,3300 3492,3300 ; 3477,3358 3646,3358 ; 3477,3503 3484,3503 ; 3478,3197 3497,3197 ; 3478,3258 3566,3258 ; 3478,3345 3550,3345 ; 3479,3196 3498,3196 ; 3479,3299 3493,3299 ; 3479,3429 3638,3429 ; 3479,3497 3592,3497 ; 3479,3504 3486,3504 ; 3480,3195 3500,3195 ; 3480,3298 3494,3298 ; 3480,3344 3553,3344 ; 3480,3450 3664,3450 ; 3481,3194 3501,3194 ; 3482,3193 3502,3193 ; 3482,3297 3495,3297 ; 3482,3498 3596,3498 ; 3482,3505 3488,3505 ; 3483,3191 3506,3191 ; 3483,3192 3504,3192 ; 3483,3257 3565,3257 ; 3483,3343 3556,3343 ; 3484,3190 3507,3190 ; 3484,3296 3496,3296 ; 3484,3430 3635,3430 ; 3484,3499 3600,3499 ; 3484,3506 3491,3506 ; 3485,3295 3497,3295 ; 3485,3451 3665,3451 ; 3486,3189 3509,3189 ; 3486,3342 3560,3342 ; 3487,3188 3511,3188 ; 3487,3359 3642,3359 ; 3487,3500 3604,3500 ; 3487,3507 3494,3507 ; 3488,3187 3513,3187 ; 3488,3294 3498,3294 ; 3489,3186 3515,3186 ; 3489,3452 3665,3452 ; 3489,3508 3496,3508 ; 3490,3185 3517,3185 ; 3490,3293 3499,3293 ; 3490,3341 3563,3341 ; 3490,3431 3633,3431 ; 3490,3501 3608,3501 ; 3491,3360 3638,3360 ; 3492,3184 3519,3184 ; 3492,3502 3612,3502 ; 3492,3509 3499,3509 ; 3493,3183 3521,3183 ; 3493,3292 3500,3292 ; 3493,3340 3567,3340 ; 3494,3182 3523,3182 ; 3494,3453 3666,3453 ; 3494,3510 3501,3510 ; 3495,3503 3618,3503 ; 3496,3181 3526,3181 ; 3496,3339 3570,3339 ; 3496,3361 3633,3361 ; 3496,3432 3630,3432 ; 3497,3291 3501,3291 ; 3497,3511 3504,3511 ; 3498,3180 3528,3180 ; 3498,3504 3623,3504 ; 3499,3179 3531,3179 ; 3499,3338 3574,3338 ; 3499,3454 3650,3454 ; 3500,3362 3628,3362 ; 3500,3512 3507,3512 ; 3501,3178 3533,3178 ; 3501,3505 3631,3505 ; 3502,3337 3578,3337 ; 3502,3433 3626,3433 ; 3502,3513 3509,3513 ; 3503,3177 3536,3177 ; 3504,3176 3539,3176 ; 3504,3455 3647,3455 ; 3504,3506 3666,3506 ; 3505,3514 3512,3514 ; 3506,3175 3542,3175 ; 3506,3256 3564,3256 ; 3506,3336 3582,3336 ; 3506,3363 3622,3363 ; 3507,3507 3666,3507 ; 3508,3174 3545,3174 ; 3508,3515 3515,3515 ; 3509,3255 3563,3255 ; 3509,3434 3622,3434 ; 3510,3173 3548,3173 ; 3510,3335 3585,3335 ; 3510,3456 3644,3456 ; 3510,3508 3665,3508 ; 3510,3516 3518,3516 ; 3511,3254 3562,3254 ; 3512,3172 3551,3172 ; 3512,3364 3616,3364 ; 3513,3253 3561,3253 ; 3513,3334 3590,3334 ; 3513,3509 3665,3509 ; 3513,3517 3520,3517 ; 3515,3171 3554,3171 ; 3515,3252 3560,3252 ; 3516,3251 3559,3251 ; 3516,3435 3618,3435 ; 3516,3457 3641,3457 ; 3516,3510 3664,3510 ; 3516,3518 3523,3518 ; 3517,3170 3559,3170 ; 3517,3250 3558,3250 ; 3517,3333 3593,3333 ; 3518,3249 3557,3249 ; 3518,3519 3526,3519 ; 3519,3169 3560,3169 ; 3519,3247 3555,3247 ; 3519,3248 3556,3248 ; 3519,3365 3609,3365 ; 3519,3511 3663,3511 ; 3520,3246 3554,3246 ; 3520,3400 3656,3400 ; 3521,3244 3552,3244 ; 3521,3245 3553,3245 ; 3521,3332 3598,3332 ; 3521,3520 3529,3520 ; 3522,3168 3562,3168 ; 3522,3242 3550,3242 ; 3522,3243 3551,3243 ; 3522,3458 3636,3458 ; 3522,3512 3663,3512 ; 3523,3240 3547,3240 ; 3523,3241 3548,3241 ; 3523,3399 3656,3399 ; 3524,3167 3563,3167 ; 3524,3238 3547,3238 ; 3524,3239 3547,3239 ; 3524,3398 3656,3398 ; 3524,3521 3532,3521 ; 3525,3235 3581,3235 ; 3525,3236 3566,3236 ; 3525,3237 3546,3237 ; 3525,3331 3602,3331 ; 3525,3397 3546,3397 ; 3525,3436 3613,3436 ; 3525,3513 3662,3513 ; 3526,3233 3553,3233 ; 3526,3234 3556,3234 ; 3526,3366 3601,3366 ; 3526,3377 3605,3377 ; 3526,3378 3593,3378 ; 3526,3379 3578,3379 ; 3526,3396 3538,3396 ; 3527,3166 3566,3166 ; 3527,3231 3550,3231 ; 3527,3232 3551,3232 ; 3527,3380 3548,3380 ; 3527,3387 3542,3387 ; 3527,3388 3610,3388 ; 3527,3389 3601,3389 ; 3527,3395 3533,3395 ; 3527,3522 3535,3522 ; 3528,3228 3549,3228 ; 3528,3229 3549,3229 ; 3528,3230 3550,3230 ; 3528,3386 3530,3386 ; 3528,3394 3529,3394 ; 3528,3514 3661,3514 ; 3529,3225 3548,3225 ; 3529,3226 3548,3226 ; 3529,3227 3548,3227 ; 3529,3330 3606,3330 ; 3529,3459 3632,3459 ; 3530,3165 3582,3165 ; 3530,3223 3572,3223 ; 3530,3224 3567,3224 ; 3530,3523 3538,3523 ; 3531,3222 3576,3222 ; 3532,3164 3564,3164 ; 3532,3220 3553,3220 ; 3532,3221 3556,3221 ; 3532,3515 3660,3515 ; 3533,3219 3551,3219 ; 3533,3329 3611,3329 ; 3533,3390 3591,3390 ; 3533,3524 3541,3524 ; 3534,3218 3551,3218 ; 3534,3437 3606,3437 ; 3535,3217 3552,3217 ; 3535,3516 3659,3516 ; 3536,3163 3558,3163 ; 3536,3216 3553,3216 ; 3536,3525 3544,3525 ; 3537,3215 3554,3215 ; 3537,3328 3616,3328 ; 3537,3367 3590,3367 ; 3537,3460 3626,3460 ; 3539,3162 3559,3162 ; 3539,3214 3555,3214 ; 3539,3517 3658,3517 ; 3539,3526 3548,3526 ; 3540,3213 3556,3213 ; 3541,3327 3622,3327 ; 3542,3161 3563,3161 ; 3542,3212 3558,3212 ; 3542,3518 3657,3518 ; 3542,3527 3551,3527 ; 3544,3211 3559,3211 ; 3545,3160 3563,3160 ; 3545,3210 3565,3210 ; 3546,3270 3575,3270 ; 3546,3312 3611,3312 ; 3546,3313 3679,3313 ; 3546,3314 3678,3314 ; 3546,3315 3677,3315 ; 3546,3316 3677,3316 ; 3546,3317 3676,3317 ; 3546,3318 3676,3318 ; 3546,3319 3675,3319 ; 3546,3326 3631,3326 ; 3546,3438 3597,3438 ; 3546,3461 3620,3461 ; 3546,3519 3656,3519 ; 3546,3528 3554,3528 ; 3547,3187 3550,3187 ; 3547,3188 3550,3188 ; 3547,3189 3550,3189 ; 3547,3209 3565,3209 ; 3547,3237 3564,3237 ; 3547,3309 3611,3309 ; 3547,3310 3611,3310 ; 3547,3311 3611,3311 ; 3547,3320 3675,3320 ; 3547,3321 3674,3321 ; 3547,3322 3674,3322 ; 3548,3159 3562,3159 ; 3548,3182 3551,3182 ; 3548,3183 3551,3183 ; 3548,3184 3551,3184 ; 3548,3185 3550,3185 ; 3548,3186 3550,3186 ; 3548,3190 3550,3190 ; 3548,3191 3550,3191 ; 3548,3192 3550,3192 ; 3548,3193 3550,3193 ; 3548,3194 3550,3194 ; 3548,3195 3551,3195 ; 3548,3238 3562,3238 ; 3548,3307 3610,3307 ; 3548,3308 3610,3308 ; 3548,3323 3673,3323 ; 3548,3324 3672,3324 ; 3548,3325 3672,3325 ; 3549,3180 3552,3180 ; 3549,3181 3552,3181 ; 3549,3196 3551,3196 ; 3549,3197 3552,3197 ; 3549,3225 3560,3225 ; 3549,3306 3610,3306 ; 3549,3391 3574,3391 ; 3549,3529 3558,3529 ; 3550,3178 3553,3178 ; 3550,3179 3553,3179 ; 3550,3198 3553,3198 ; 3550,3208 3565,3208 ; 3550,3239 3558,3239 ; 3550,3304 3610,3304 ; 3550,3305 3610,3305 ; 3550,3520 3655,3520 ; 3551,3176 3554,3176 ; 3551,3177 3554,3177 ; 3551,3199 3555,3199 ; 3551,3303 3610,3303 ; 3552,3158 3562,3158 ; 3552,3174 3555,3174 ; 3552,3175 3555,3175 ; 3552,3200 3575,3200 ; 3552,3201 3572,3201 ; 3552,3202 3553,3202 ; 3552,3203 3554,3203 ; 3552,3207 3567,3207 ; 3552,3226 3555,3226 ; 3552,3302 3609,3302 ; 3552,3530 3562,3530 ; 3553,3173 3556,3173 ; 3553,3204 3557,3204 ; 3553,3300 3609,3300 ; 3553,3301 3609,3301 ; 3554,3172 3557,3172 ; 3554,3299 3608,3299 ; 3554,3521 3653,3521 ; 3555,3157 3562,3157 ; 3555,3171 3558,3171 ; 3555,3205 3566,3205 ; 3555,3206 3567,3206 ; 3555,3298 3608,3298 ; 3556,3202 3568,3202 ; 3556,3297 3607,3297 ; 3556,3531 3566,3531 ; 3557,3185 3563,3185 ; 3557,3186 3563,3186 ; 3557,3187 3558,3187 ; 3557,3296 3607,3296 ; 3557,3368 3569,3368 ; 3557,3462 3610,3462 ; 3558,3184 3562,3184 ; 3558,3221 3588,3221 ; 3558,3295 3606,3295 ; 3558,3522 3652,3522 ; 3559,3156 3562,3156 ; 3559,3183 3561,3183 ; 3559,3234 3583,3234 ; 3559,3294 3606,3294 ; 3559,3532 3570,3532 ; 3560,3155 3574,3155 ; 3560,3163 3563,3163 ; 3560,3187 3564,3187 ; 3560,3188 3564,3188 ; 3560,3189 3563,3189 ; 3560,3190 3563,3190 ; 3560,3191 3562,3191 ; 3560,3271 3576,3271 ; 3560,3293 3605,3293 ; 3561,3154 3564,3154 ; 3561,3162 3563,3162 ; 3561,3211 3565,3211 ; 3561,3212 3564,3212 ; 3561,3292 3604,3292 ; 3562,3180 3564,3180 ; 3562,3181 3564,3181 ; 3562,3182 3565,3182 ; 3562,3204 3564,3204 ; 3562,3213 3565,3213 ; 3562,3214 3565,3214 ; 3562,3215 3565,3215 ; 3562,3225 3567,3225 ; 3562,3226 3567,3226 ; 3562,3227 3568,3227 ; 3562,3291 3603,3291 ; 3562,3523 3650,3523 ; 3563,3156 3577,3156 ; 3563,3178 3579,3178 ; 3563,3179 3579,3179 ; 3563,3183 3568,3183 ; 3563,3216 3565,3216 ; 3563,3217 3566,3217 ; 3563,3218 3567,3218 ; 3563,3220 3572,3220 ; 3563,3228 3568,3228 ; 3563,3229 3569,3229 ; 3563,3230 3570,3230 ; 3563,3533 3574,3533 ; 3564,3157 3576,3157 ; 3564,3177 3580,3177 ; 3564,3219 3568,3219 ; 3564,3231 3571,3231 ; 3564,3232 3574,3232 ; 3564,3233 3597,3233 ; 3564,3290 3602,3290 ; 3564,3376 3614,3376 ; 3565,3158 3575,3158 ; 3565,3164 3580,3164 ; 3565,3176 3580,3176 ; 3565,3199 3566,3199 ; 3565,3289 3601,3289 ; 3566,3154 3580,3154 ; 3566,3175 3579,3175 ; 3566,3182 3573,3182 ; 3566,3524 3648,3524 ; 3567,3180 3577,3180 ; 3567,3181 3576,3181 ; 3567,3236 3579,3236 ; 3567,3288 3600,3288 ; 3567,3439 3580,3439 ; 3567,3534 3579,3534 ; 3568,3160 3572,3160 ; 3568,3161 3570,3161 ; 3568,3163 3576,3163 ; 3568,3168 3570,3168 ; 3568,3169 3569,3169 ; 3568,3170 3569,3170 ; 3568,3174 3578,3174 ; 3568,3287 3599,3287 ; 3569,3153 3576,3153 ; 3569,3159 3572,3159 ; 3569,3167 3574,3167 ; 3569,3173 3576,3173 ; 3569,3199 3577,3199 ; 3569,3237 3575,3237 ; 3570,3166 3573,3166 ; 3570,3286 3597,3286 ; 3571,3172 3573,3172 ; 3571,3525 3646,3525 ; 3571,3535 3584,3535 ; 3572,3161 3573,3161 ; 3572,3198 3580,3198 ; 3572,3285 3596,3285 ; 3573,3152 3578,3152 ; 3573,3168 3575,3168 ; 3574,3169 3576,3169 ; 3574,3170 3576,3170 ; 3574,3220 3598,3220 ; 3574,3272 3576,3272 ; 3574,3284 3593,3284 ; 3575,3155 3581,3155 ; 3575,3536 3590,3536 ; 3576,3151 3579,3151 ; 3576,3197 3583,3197 ; 3576,3463 3594,3463 ; 3576,3526 3643,3526 ; 3577,3163 3580,3163 ; 3577,3207 3581,3207 ; 3577,3208 3581,3208 ; 3577,3209 3581,3209 ; 3577,3232 3598,3232 ; 3577,3283 3590,3283 ; 3578,3156 3581,3156 ; 3578,3159 3581,3159 ; 3578,3160 3581,3160 ; 3578,3161 3581,3161 ; 3578,3162 3580,3162 ; 3578,3196 3585,3196 ; 3578,3206 3581,3206 ; 3578,3210 3581,3210 ; 3578,3211 3581,3211 ; 3578,3212 3581,3212 ; 3578,3213 3581,3213 ; 3578,3214 3581,3214 ; 3578,3215 3581,3215 ; 3578,3387 3618,3387 ; 3579,3150 3606,3150 ; 3579,3157 3581,3157 ; 3579,3158 3581,3158 ; 3579,3166 3585,3166 ; 3579,3216 3581,3216 ; 3579,3217 3582,3217 ; 3579,3218 3598,3218 ; 3579,3219 3598,3219 ; 3579,3222 3582,3222 ; 3580,3205 3582,3205 ; 3580,3223 3582,3223 ; 3580,3224 3582,3224 ; 3580,3225 3583,3225 ; 3580,3226 3583,3226 ; 3580,3227 3583,3227 ; 3580,3356 3653,3356 ; 3581,3151 3607,3151 ; 3581,3167 3587,3167 ; 3581,3179 3586,3179 ; 3581,3180 3586,3180 ; 3581,3195 3587,3195 ; 3581,3204 3590,3204 ; 3581,3228 3584,3228 ; 3581,3229 3584,3229 ; 3581,3230 3586,3230 ; 3581,3231 3622,3231 ; 3581,3537 3599,3537 ; 3582,3149 3605,3149 ; 3582,3152 3608,3152 ; 3582,3153 3609,3153 ; 3582,3178 3585,3178 ; 3582,3203 3598,3203 ; 3582,3527 3640,3527 ; 3583,3154 3609,3154 ; 3583,3168 3588,3168 ; 3583,3181 3586,3181 ; 3583,3183 3586,3183 ; 3583,3194 3589,3194 ; 3583,3202 3615,3202 ; 3584,3148 3604,3148 ; 3584,3155 3610,3155 ; 3584,3182 3586,3182 ; 3584,3375 3622,3375 ; 3585,3156 3611,3156 ; 3585,3157 3596,3157 ; 3585,3169 3590,3169 ; 3585,3193 3590,3193 ; 3585,3201 3614,3201 ; 3586,3158 3594,3158 ; 3586,3200 3614,3200 ; 3586,3397 3656,3397 ; 3586,3538 3643,3538 ; 3587,3147 3604,3147 ; 3587,3159 3591,3159 ; 3587,3170 3591,3170 ; 3587,3192 3592,3192 ; 3587,3199 3613,3199 ; 3587,3234 3594,3234 ; 3588,3171 3592,3171 ; 3588,3191 3609,3191 ; 3588,3198 3613,3198 ; 3588,3528 3636,3528 ; 3589,3172 3593,3172 ; 3590,3146 3603,3146 ; 3590,3173 3593,3173 ; 3590,3190 3608,3190 ; 3590,3197 3612,3197 ; 3591,3174 3594,3174 ; 3591,3189 3598,3189 ; 3591,3204 3596,3204 ; 3591,3205 3596,3205 ; 3592,3145 3602,3145 ; 3592,3175 3595,3175 ; 3592,3176 3596,3176 ; 3592,3188 3597,3188 ; 3592,3206 3596,3206 ; 3592,3207 3595,3207 ; 3592,3208 3596,3208 ; 3592,3209 3596,3209 ; 3592,3210 3596,3210 ; 3592,3211 3596,3211 ; 3592,3212 3597,3212 ; 3592,3447 3663,3447 ; 3592,3539 3638,3539 ; 3593,3177 3596,3177 ; 3593,3186 3597,3186 ; 3593,3187 3597,3187 ; 3593,3196 3611,3196 ; 3593,3213 3597,3213 ; 3593,3214 3599,3214 ; 3593,3215 3601,3215 ; 3593,3216 3612,3216 ; 3593,3217 3598,3217 ; 3593,3386 3624,3386 ; 3594,3144 3601,3144 ; 3594,3178 3596,3178 ; 3594,3179 3597,3179 ; 3594,3180 3597,3180 ; 3594,3184 3597,3184 ; 3594,3185 3597,3185 ; 3594,3192 3609,3192 ; 3594,3221 3598,3221 ; 3594,3222 3599,3222 ; 3594,3223 3599,3223 ; 3594,3230 3623,3230 ; 3595,3181 3597,3181 ; 3595,3182 3597,3182 ; 3595,3183 3597,3183 ; 3595,3224 3599,3224 ; 3595,3225 3600,3225 ; 3596,3143 3600,3143 ; 3596,3193 3610,3193 ; 3596,3226 3601,3226 ; 3596,3227 3601,3227 ; 3596,3396 3656,3396 ; 3596,3529 3630,3529 ; 3597,3228 3603,3228 ; 3597,3229 3605,3229 ; 3597,3374 3629,3374 ; 3599,3194 3610,3194 ; 3599,3195 3610,3195 ; 3599,3217 3611,3217 ; 3600,3157 3612,3157 ; 3600,3189 3607,3189 ; 3600,3232 3622,3232 ; 3600,3540 3633,3540 ; 3601,3233 3611,3233 ; 3601,3355 3656,3355 ; 3601,3446 3663,3446 ; 3602,3158 3612,3158 ; 3602,3203 3604,3203 ; 3602,3204 3604,3204 ; 3602,3215 3613,3215 ; 3602,3257 3618,3257 ; 3602,3258 3620,3258 ; 3602,3259 3631,3259 ; 3602,3260 3631,3260 ; 3602,3261 3631,3261 ; 3602,3262 3631,3262 ; 3602,3263 3630,3263 ; 3602,3264 3630,3264 ; 3602,3265 3630,3265 ; 3602,3266 3630,3266 ; 3603,3159 3613,3159 ; 3603,3160 3613,3160 ; 3603,3174 3612,3174 ; 3603,3175 3612,3175 ; 3603,3176 3612,3176 ; 3603,3205 3605,3205 ; 3603,3206 3605,3206 ; 3603,3207 3605,3207 ; 3603,3208 3606,3208 ; 3603,3209 3606,3209 ; 3603,3210 3606,3210 ; 3603,3211 3606,3211 ; 3603,3212 3607,3212 ; 3603,3213 3608,3213 ; 3603,3214 3624,3214 ; 3603,3254 3615,3254 ; 3603,3255 3616,3255 ; 3603,3256 3617,3256 ; 3603,3267 3629,3267 ; 3603,3268 3629,3268 ; 3603,3269 3629,3269 ; 3603,3270 3629,3270 ; 3603,3271 3628,3271 ; 3603,3272 3628,3272 ; 3604,3161 3614,3161 ; 3604,3162 3614,3162 ; 3604,3163 3615,3163 ; 3604,3169 3613,3169 ; 3604,3170 3613,3170 ; 3604,3171 3613,3171 ; 3604,3172 3613,3172 ; 3604,3173 3612,3173 ; 3604,3234 3607,3234 ; 3604,3252 3612,3252 ; 3604,3253 3614,3253 ; 3604,3273 3628,3273 ; 3604,3274 3628,3274 ; 3604,3275 3627,3275 ; 3604,3276 3627,3276 ; 3604,3385 3630,3385 ; 3604,3395 3657,3395 ; 3605,3164 3615,3164 ; 3605,3165 3615,3165 ; 3605,3166 3614,3166 ; 3605,3167 3614,3167 ; 3605,3168 3614,3168 ; 3605,3251 3611,3251 ; 3605,3277 3627,3277 ; 3605,3278 3627,3278 ; 3605,3279 3627,3279 ; 3606,3218 3611,3218 ; 3606,3280 3626,3280 ; 3606,3281 3626,3281 ; 3606,3282 3626,3282 ; 3606,3283 3626,3283 ; 3607,3219 3611,3219 ; 3607,3220 3611,3220 ; 3607,3221 3611,3221 ; 3607,3222 3610,3222 ; 3607,3250 3610,3250 ; 3607,3284 3626,3284 ; 3607,3285 3625,3285 ; 3607,3286 3625,3286 ; 3607,3373 3634,3373 ; 3607,3445 3662,3445 ; 3608,3203 3616,3203 ; 3608,3223 3610,3223 ; 3608,3224 3610,3224 ; 3608,3225 3610,3225 ; 3608,3226 3610,3226 ; 3608,3227 3610,3227 ; 3608,3228 3610,3228 ; 3608,3229 3624,3229 ; 3608,3287 3625,3287 ; 3608,3288 3625,3288 ; 3608,3289 3625,3289 ; 3609,3204 3617,3204 ; 3609,3205 3618,3205 ; 3609,3290 3624,3290 ; 3609,3291 3624,3291 ; 3610,3206 3619,3206 ; 3610,3292 3624,3292 ; 3610,3293 3624,3293 ; 3610,3294 3624,3294 ; 3611,3207 3620,3207 ; 3611,3208 3621,3208 ; 3611,3213 3623,3213 ; 3611,3295 3624,3295 ; 3611,3296 3623,3296 ; 3611,3297 3623,3297 ; 3611,3530 3617,3530 ; 3612,3209 3621,3209 ; 3612,3212 3623,3212 ; 3612,3235 3620,3235 ; 3612,3236 3619,3236 ; 3612,3237 3619,3237 ; 3612,3238 3619,3238 ; 3612,3239 3618,3239 ; 3612,3240 3618,3240 ; 3612,3241 3618,3241 ; 3612,3298 3623,3298 ; 3612,3299 3623,3299 ; 3612,3384 3635,3384 ; 3612,3394 3657,3394 ; 3612,3444 3662,3444 ; 3613,3210 3622,3210 ; 3613,3211 3622,3211 ; 3613,3228 3624,3228 ; 3613,3233 3621,3233 ; 3613,3234 3621,3234 ; 3613,3242 3618,3242 ; 3613,3243 3618,3243 ; 3613,3244 3619,3244 ; 3613,3300 3623,3300 ; 3613,3301 3623,3301 ; 3613,3302 3623,3302 ; 3613,3354 3667,3354 ; 3614,3245 3619,3245 ; 3614,3246 3619,3246 ; 3614,3247 3620,3247 ; 3614,3303 3623,3303 ; 3614,3304 3623,3304 ; 3614,3312 3679,3312 ; 3615,3215 3624,3215 ; 3615,3227 3624,3227 ; 3615,3248 3621,3248 ; 3615,3249 3622,3249 ; 3615,3305 3622,3305 ; 3615,3306 3622,3306 ; 3615,3307 3622,3307 ; 3616,3216 3624,3216 ; 3616,3217 3624,3217 ; 3616,3218 3625,3218 ; 3616,3250 3623,3250 ; 3616,3308 3622,3308 ; 3616,3309 3622,3309 ; 3616,3372 3639,3372 ; 3616,3541 3618,3541 ; 3617,3219 3625,3219 ; 3617,3220 3625,3220 ; 3617,3221 3625,3221 ; 3617,3222 3625,3222 ; 3617,3223 3625,3223 ; 3617,3224 3625,3224 ; 3617,3225 3625,3225 ; 3617,3226 3625,3226 ; 3617,3251 3624,3251 ; 3617,3252 3626,3252 ; 3617,3310 3623,3310 ; 3617,3311 3680,3311 ; 3617,3393 3657,3393 ; 3617,3443 3661,3443 ; 3618,3253 3629,3253 ; 3618,3383 3640,3383 ; 3619,3254 3633,3254 ; 3619,3255 3632,3255 ; 3619,3530 3620,3530 ; 3620,3256 3632,3256 ; 3621,3257 3632,3257 ; 3621,3442 3661,3442 ; 3622,3258 3632,3258 ; 3622,3353 3666,3353 ; 3623,3371 3643,3371 ; 3623,3392 3657,3392 ; 3625,3310 3680,3310 ; 3625,3382 3644,3382 ; 3625,3441 3661,3441 ; 3627,3351 3665,3351 ; 3627,3352 3666,3352 ; 3628,3349 3662,3349 ; 3628,3350 3664,3350 ; 3628,3440 3660,3440 ; 3629,3347 3661,3347 ; 3629,3348 3661,3348 ; 3629,3391 3657,3391 ; 3629,3537 3646,3537 ; 3630,3344 3662,3344 ; 3630,3345 3662,3345 ; 3630,3346 3661,3346 ; 3630,3370 3647,3370 ; 3631,3309 3681,3309 ; 3631,3342 3663,3342 ; 3631,3343 3663,3343 ; 3631,3381 3648,3381 ; 3631,3439 3660,3439 ; 3632,3326 3671,3326 ; 3632,3338 3665,3338 ; 3632,3339 3665,3339 ; 3632,3340 3664,3340 ; 3632,3341 3664,3341 ; 3633,3327 3671,3327 ; 3633,3328 3670,3328 ; 3633,3329 3670,3329 ; 3633,3330 3669,3330 ; 3633,3331 3669,3331 ; 3633,3332 3668,3332 ; 3633,3333 3668,3333 ; 3633,3334 3667,3334 ; 3633,3335 3667,3335 ; 3633,3336 3666,3336 ; 3633,3337 3666,3337 ; 3634,3390 3658,3390 ; 3634,3438 3659,3438 ; 3635,3369 3651,3369 ; 3635,3536 3649,3536 ; 3636,3181 3637,3181 ; 3636,3182 3637,3182 ; 3636,3308 3681,3308 ; 3636,3380 3652,3380 ; 3637,3437 3659,3437 ; 3638,3178 3639,3178 ; 3638,3179 3639,3179 ; 3638,3389 3660,3389 ; 3640,3368 3654,3368 ; 3640,3436 3658,3436 ; 3640,3535 3652,3535 ; 3641,3379 3655,3379 ; 3642,3307 3682,3307 ; 3642,3435 3658,3435 ; 3643,3388 3661,3388 ; 3643,3534 3654,3534 ; 3644,3367 3656,3367 ; 3645,3178 3646,3178 ; 3645,3378 3658,3378 ; 3645,3434 3657,3434 ; 3646,3179 3647,3179 ; 3646,3180 3647,3180 ; 3646,3505 3667,3505 ; 3646,3533 3656,3533 ; 3647,3433 3657,3433 ; 3648,3306 3682,3306 ; 3648,3366 3658,3366 ; 3648,3387 3662,3387 ; 3648,3532 3658,3532 ; 3649,3377 3667,3377 ; 3650,3432 3657,3432 ; 3650,3504 3667,3504 ; 3651,3365 3660,3365 ; 3651,3454 3666,3454 ; 3651,3531 3660,3531 ; 3652,3376 3667,3376 ; 3652,3386 3663,3386 ; 3652,3431 3658,3431 ; 3652,3455 3667,3455 ; 3652,3503 3668,3503 ; 3653,3420 3660,3420 ; 3653,3456 3667,3456 ; 3653,3530 3661,3530 ; 3654,3305 3682,3305 ; 3654,3364 3662,3364 ; 3654,3430 3659,3430 ; 3654,3457 3667,3457 ; 3654,3458 3668,3458 ; 3654,3502 3668,3502 ; 3655,3375 3668,3375 ; 3655,3429 3659,3429 ; 3655,3459 3668,3459 ; 3655,3500 3669,3500 ; 3655,3501 3668,3501 ; 3655,3529 3662,3529 ; 3656,3363 3669,3363 ; 3656,3385 3663,3385 ; 3656,3421 3661,3421 ; 3656,3427 3660,3427 ; 3656,3428 3660,3428 ; 3656,3460 3669,3460 ; 3656,3461 3669,3461 ; 3656,3499 3669,3499 ; 3656,3528 3664,3528 ; 3657,3422 3661,3422 ; 3657,3423 3661,3423 ; 3657,3424 3661,3424 ; 3657,3425 3661,3425 ; 3657,3426 3661,3426 ; 3657,3462 3669,3462 ; 3657,3463 3670,3463 ; 3657,3497 3669,3497 ; 3657,3498 3669,3498 ; 3658,3355 3667,3355 ; 3658,3362 3669,3362 ; 3658,3374 3668,3374 ; 3658,3384 3664,3384 ; 3658,3464 3670,3464 ; 3658,3465 3670,3465 ; 3658,3495 3670,3495 ; 3658,3496 3670,3496 ; 3658,3527 3665,3527 ; 3659,3382 3665,3382 ; 3659,3383 3665,3383 ; 3659,3466 3671,3466 ; 3659,3467 3671,3467 ; 3659,3468 3671,3468 ; 3659,3493 3676,3493 ; 3659,3494 3670,3494 ; 3659,3526 3666,3526 ; 3660,3304 3681,3304 ; 3660,3361 3669,3361 ; 3660,3381 3666,3381 ; 3660,3469 3672,3469 ; 3660,3470 3672,3470 ; 3660,3471 3672,3471 ; 3660,3490 3676,3490 ; 3660,3491 3676,3491 ; 3660,3492 3676,3492 ; 3660,3525 3667,3525 ; 3661,3356 3668,3356 ; 3661,3360 3669,3360 ; 3661,3373 3668,3373 ; 3661,3378 3667,3378 ; 3661,3379 3666,3379 ; 3661,3380 3666,3380 ; 3661,3472 3673,3472 ; 3661,3473 3673,3473 ; 3661,3474 3673,3474 ; 3661,3475 3673,3475 ; 3661,3476 3674,3476 ; 3661,3477 3674,3477 ; 3661,3484 3675,3484 ; 3661,3485 3675,3485 ; 3661,3486 3675,3486 ; 3661,3487 3676,3487 ; 3661,3488 3676,3488 ; 3661,3489 3676,3489 ; 3662,3357 3668,3357 ; 3662,3478 3674,3478 ; 3662,3479 3674,3479 ; 3662,3480 3674,3480 ; 3662,3481 3675,3481 ; 3662,3482 3675,3482 ; 3662,3483 3675,3483 ; 3662,3524 3668,3524 ; 3663,3358 3668,3358 ; 3663,3359 3668,3359 ; 3663,3371 3668,3371 ; 3663,3372 3668,3372 ; 3663,3523 3669,3523 ; 3664,3364 3669,3364 ; 3664,3365 3669,3365 ; 3664,3366 3669,3366 ; 3664,3367 3669,3367 ; 3664,3368 3669,3368 ; 3664,3369 3669,3369 ; 3664,3370 3669,3370 ; 3664,3522 3670,3522 ; 3665,3520 3672,3520 ; 3665,3521 3671,3521 ; 3666,3303 3681,3303 ; 3666,3519 3672,3519 ; 3667,3518 3673,3518 ; 3668,3516 3674,3516 ; 3668,3517 3673,3517 ; 3669,3514 3675,3514 ; 3669,3515 3674,3515 ; 3670,3512 3675,3512 ; 3670,3513 3675,3513 ; 3671,3494 3676,3494 ; 3671,3495 3677,3495 ; 3671,3496 3677,3496 ; 3671,3497 3677,3497 ; 3671,3498 3677,3498 ; 3671,3499 3677,3499 ; 3671,3500 3677,3500 ; 3671,3501 3677,3501 ; 3671,3502 3677,3502 ; 3671,3503 3677,3503 ; 3671,3504 3677,3504 ; 3671,3505 3677,3505 ; 3671,3506 3677,3506 ; 3671,3507 3676,3507 ; 3671,3508 3676,3508 ; 3671,3509 3676,3509 ; 3671,3510 3676,3510 ; 3671,3511 3676,3511 ; 3673,3302 3680,3302

## Text inside footprints (layer, text, board x,y; h text height)
C1: Top Overlay "+" at 3094.26,2663.99 h47.24
C2: Top Overlay "+" at 3749,3077 h47.24 r270